# Altium PCB PCB1.PcbDoc
Units mil, origin at the board's own origin, x right, y up, seen from the top; angles counter-clockwise.
Board outline 6000 x 4000 mil, 4 copper layers (Top Layer, 5V, GND, Bottom Layer), stack 23.756 mil thick; 43 components, 34 nets, 161 pads, 102 vias.
Unrouted connection lines stored in the file: 13.
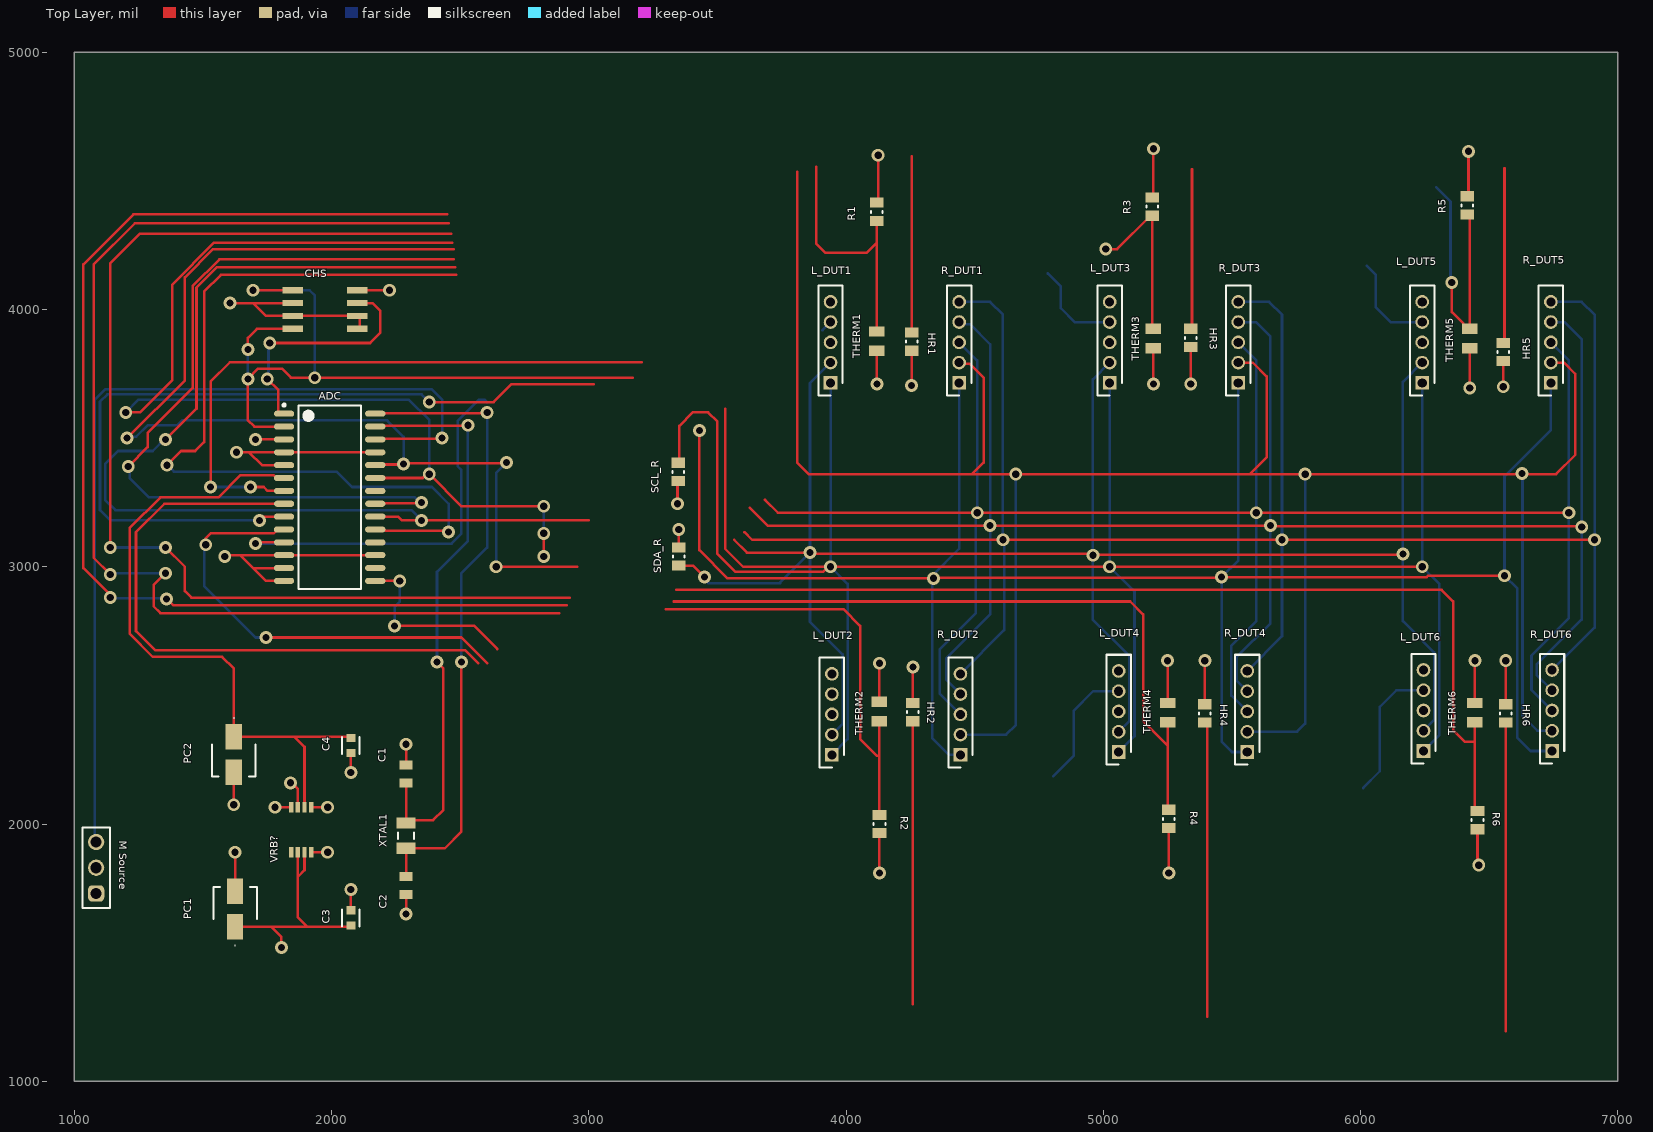
[diagram p0: Top Layer view]
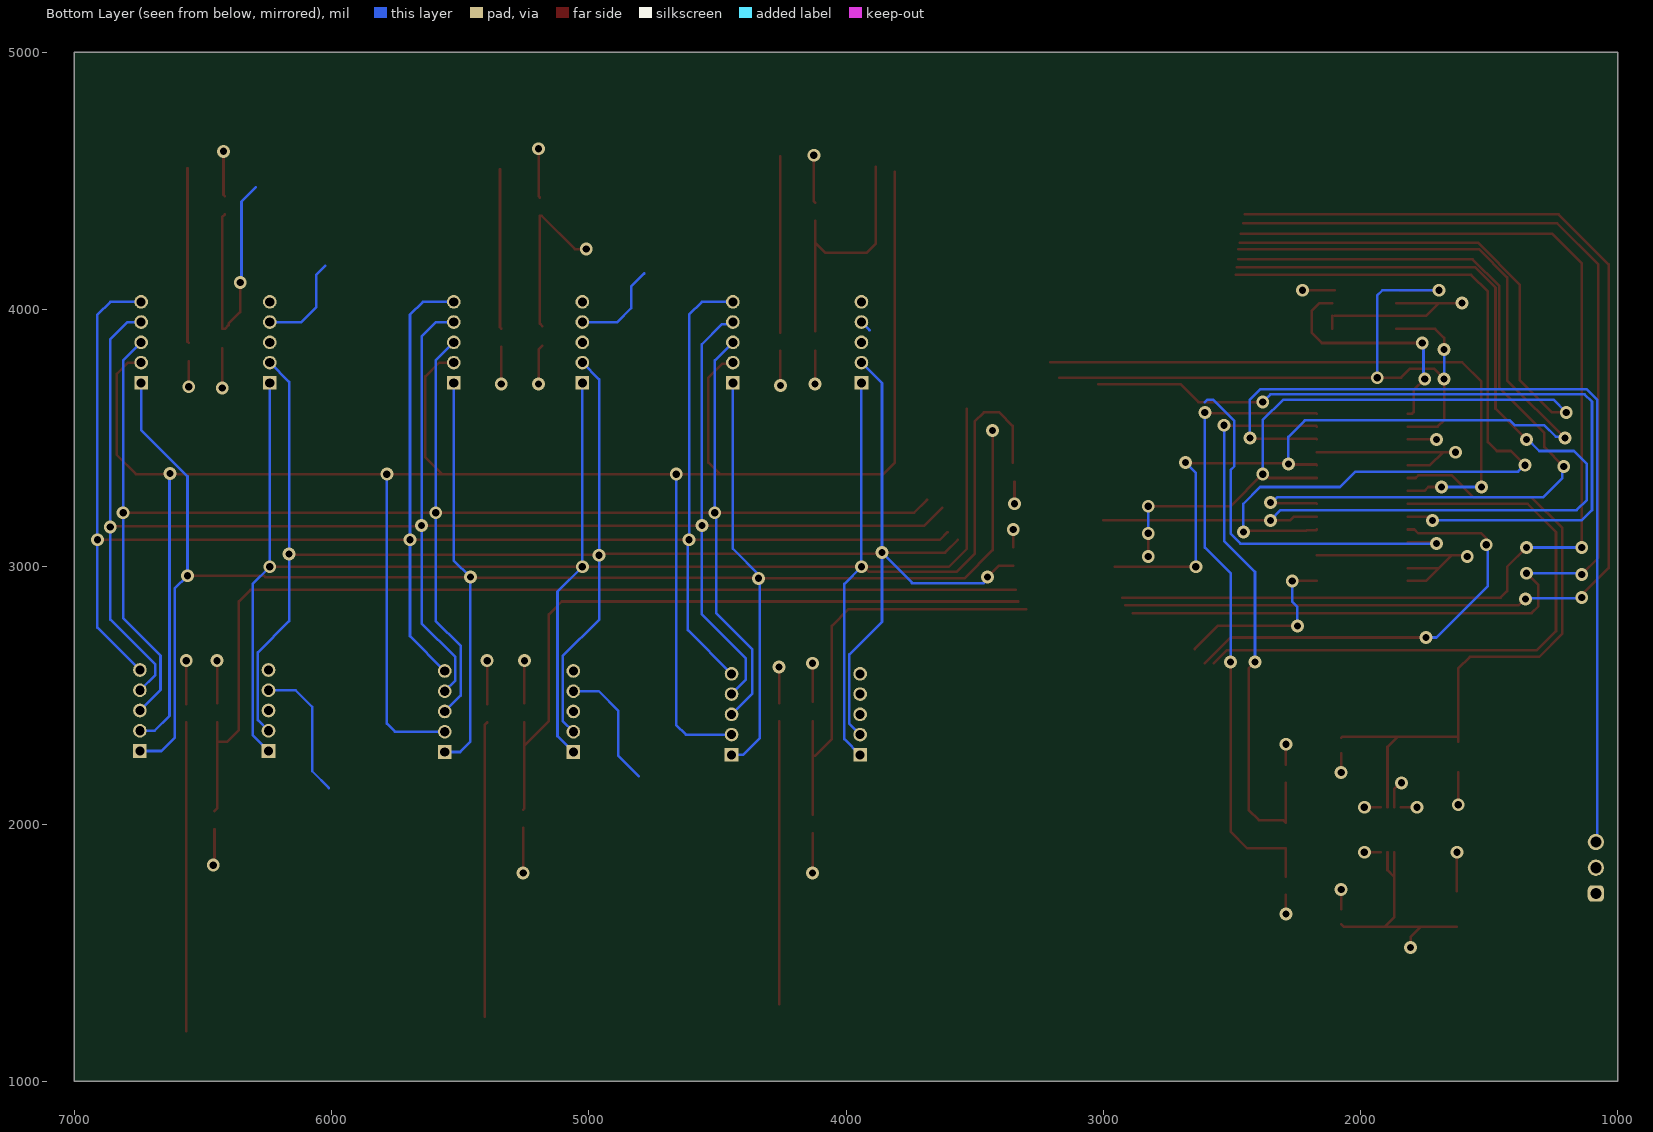
[diagram p1: Bottom Layer view, seen from below]
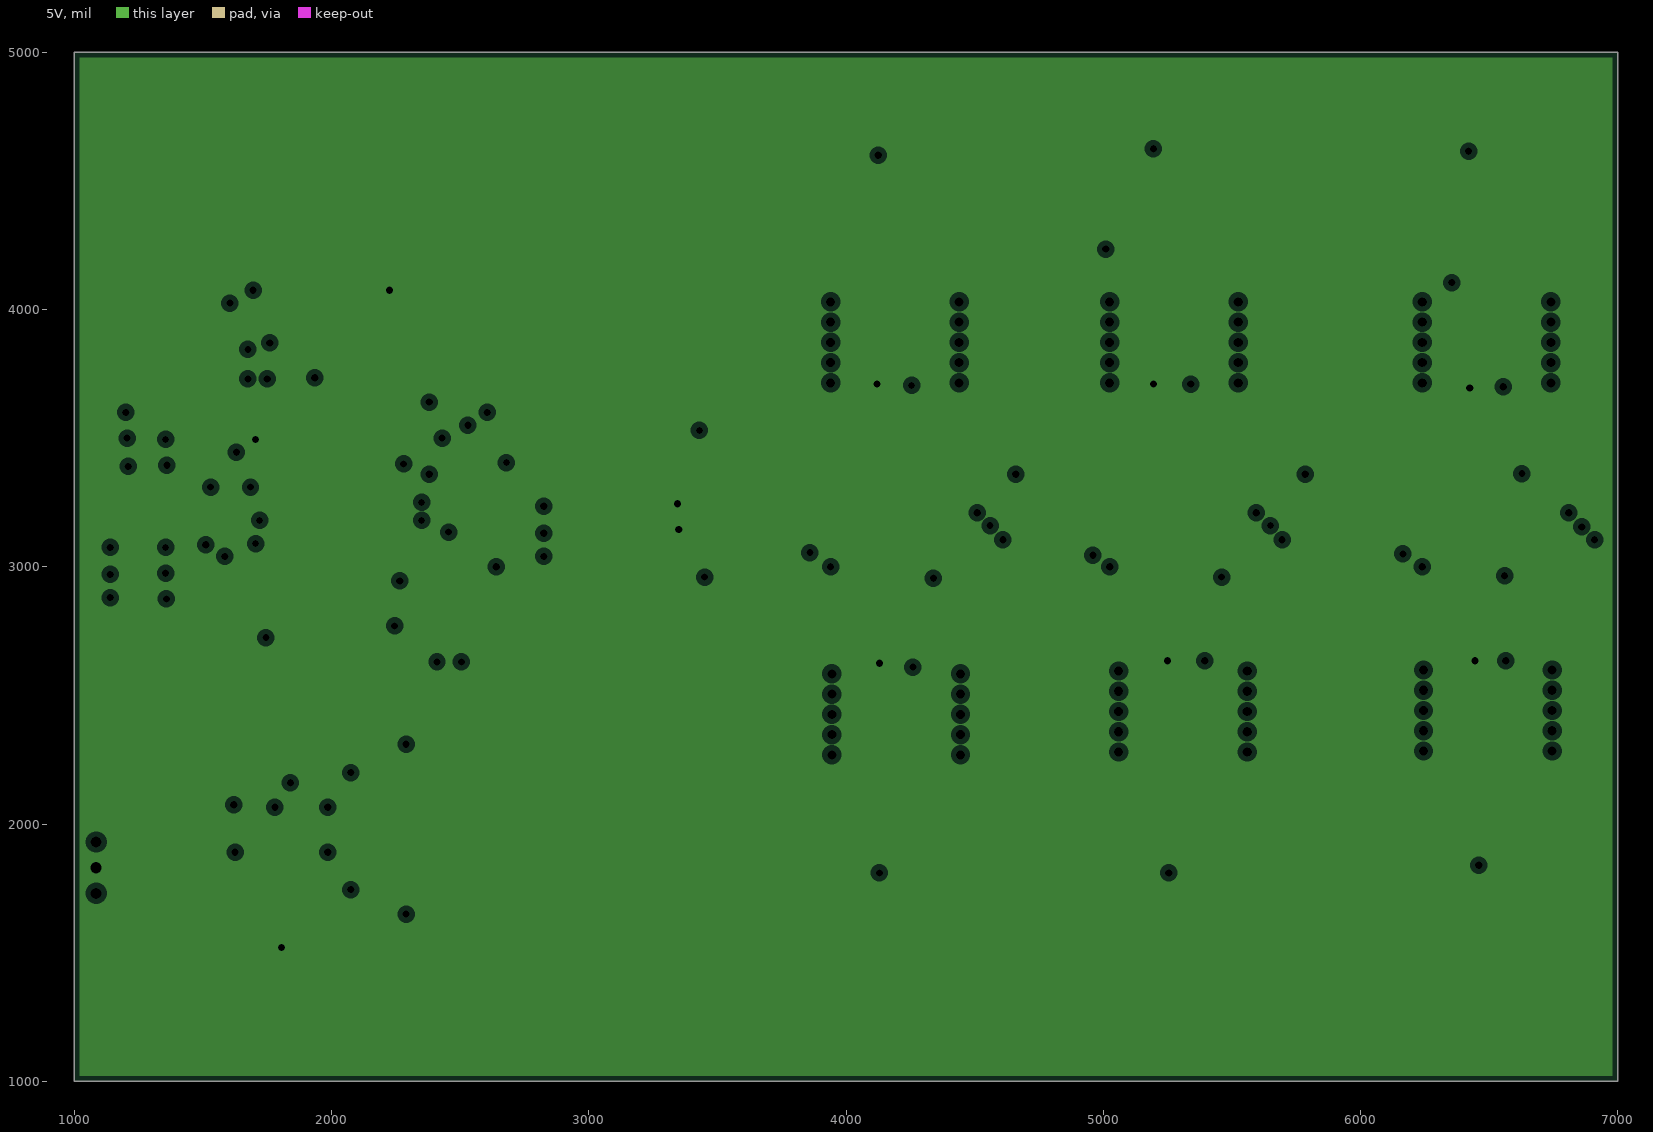
[diagram p2: 5V, clearances drawn from the general rule]
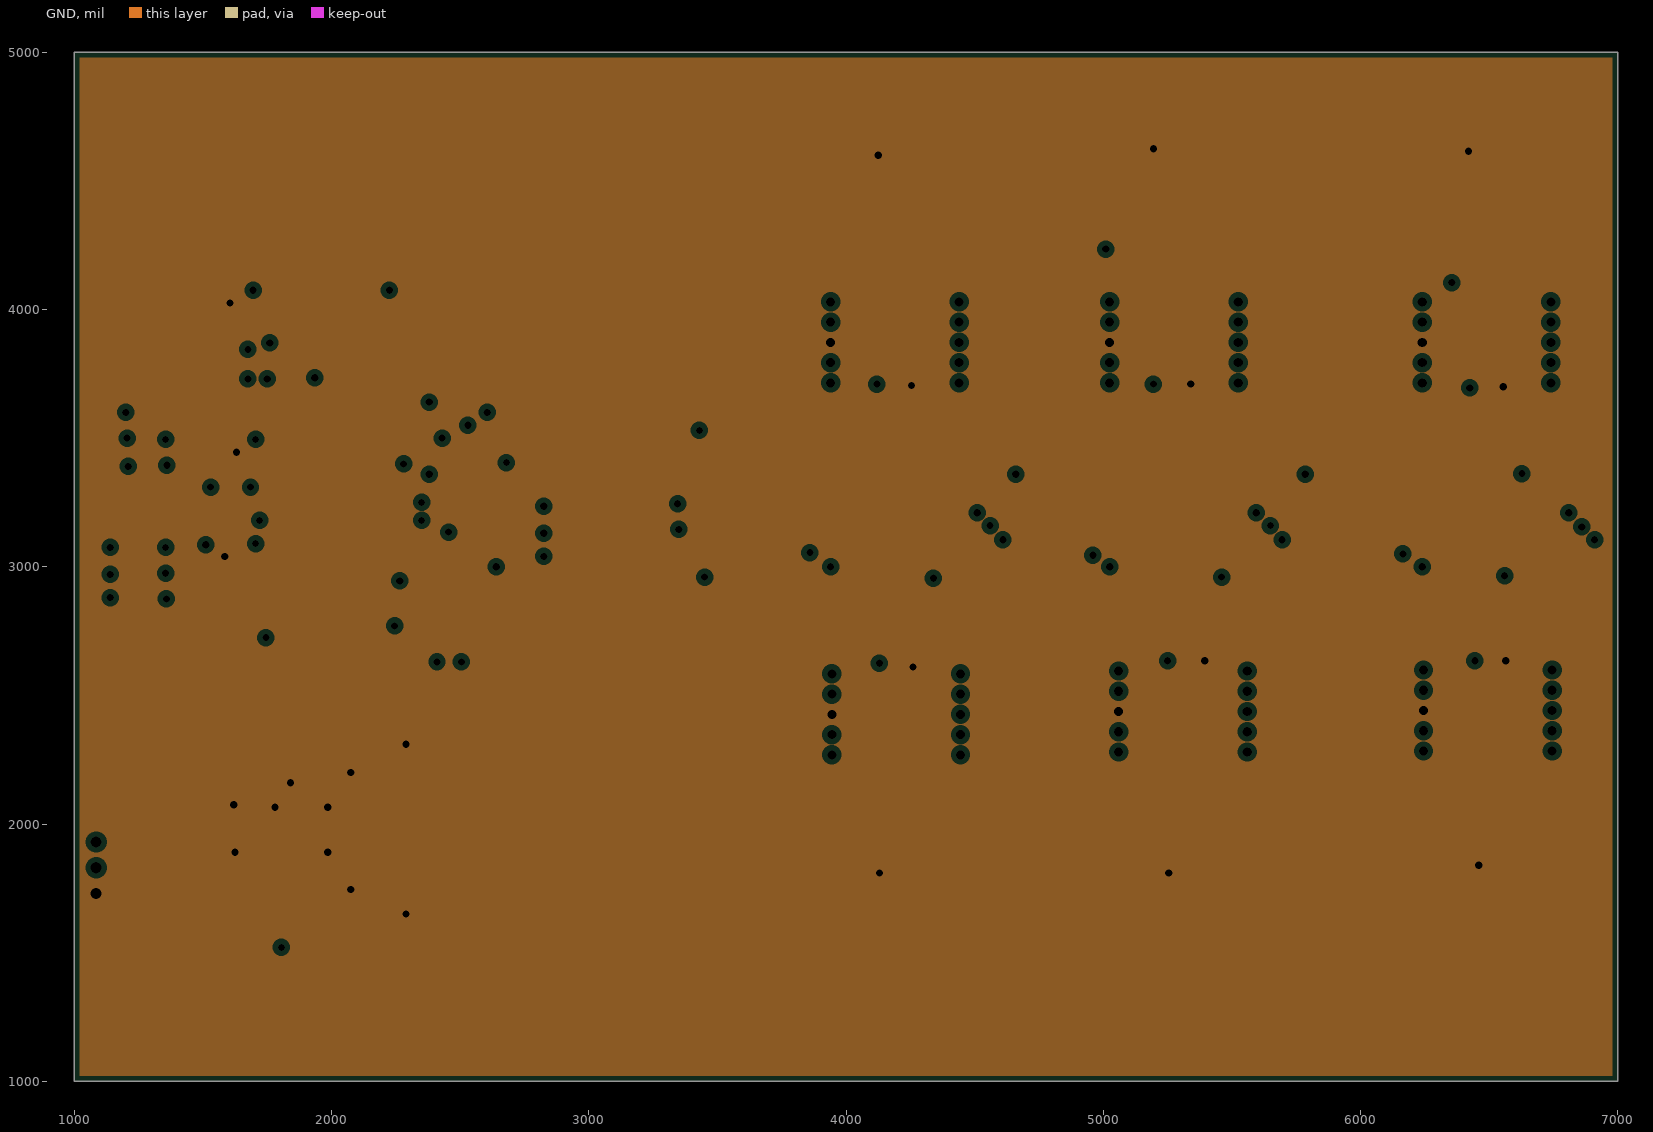
[diagram p3: GND, clearances drawn from the general rule]
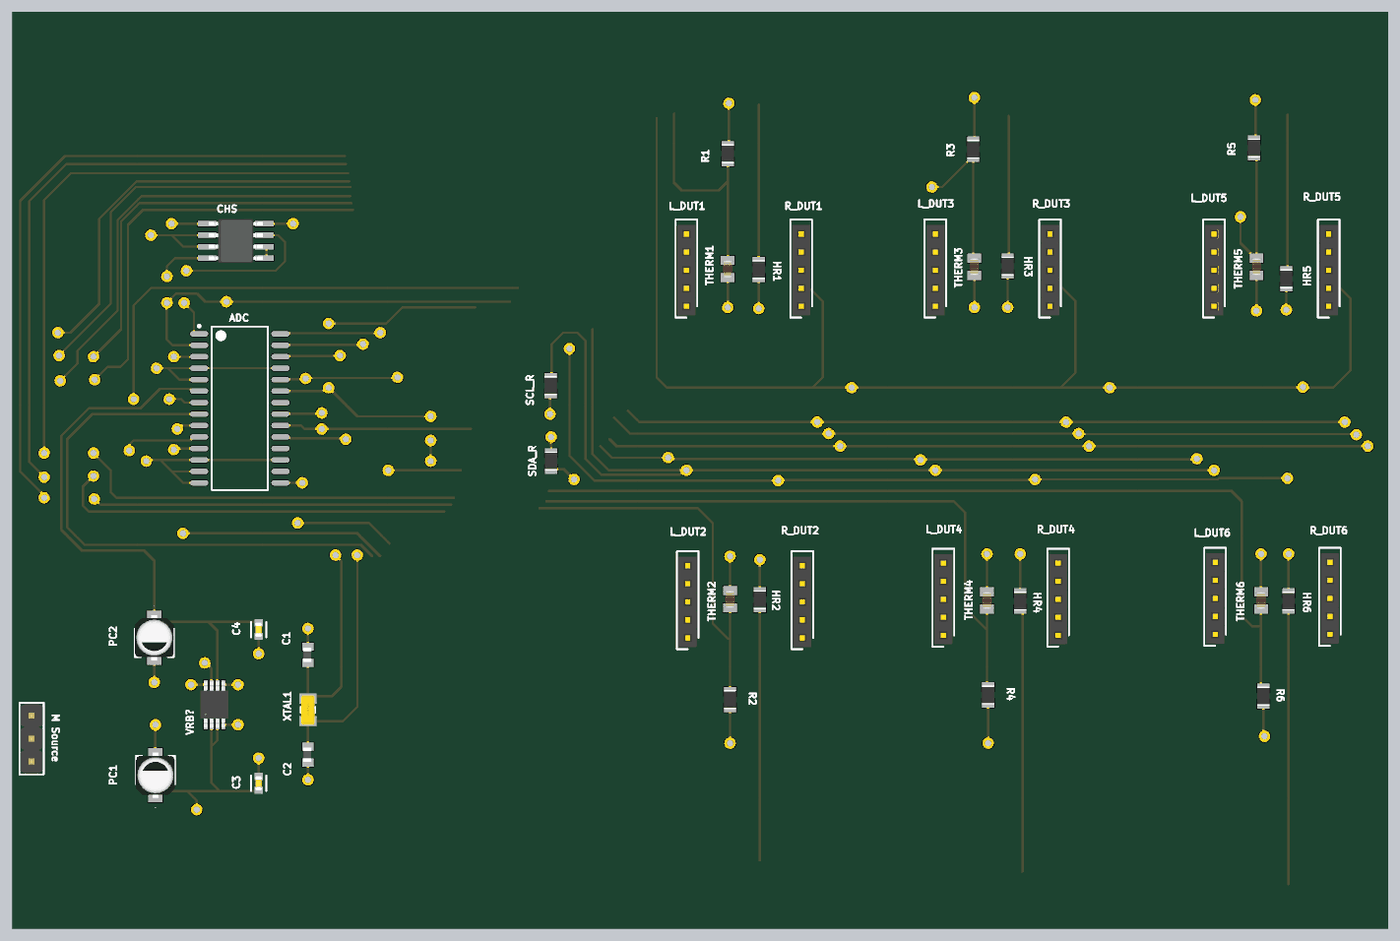
[diagram p4: 3D render of the assembled board from above, using the file's embedded part models]

## Layer stack, top to bottom
Top Solder: solder mask 0.4, Solder Resist, Dk 3.5
Top Layer: signal copper 1.4
Dielectric 2: prepreg 2.8, PP-006, Dk 4.1
5V: plane copper 1.378, net A5V0
Dielectric 1: dielectric 12.6, FR-4, Dk 4.8
GND: plane copper 1.378, net AGND
Dielectric 3: prepreg 2.8, PP-006, Dk 4.1
Bottom Layer: signal copper 1.4
Bottom Solder: solder mask 0.4, Solder Resist, Dk 3.5

## Board outline
1000,1000 7000,1000 7000,5000 1000,5000

## Design rules (kind name [scope] priority, off if disabled: settings)
Clearance [All] p1: gap=5 ignorepadtopadclearanceinfootprint=FALSE
PlaneClearance [All] p1: clearance=20
PlaneConnect [All] p1: planeconnectstyle=Relief reliefexpansion=20 reliefentries=4 reliefconductorwidth=10 reliefairgap=10
PolygonConnect [All] p1: connectstyle=Relief reliefconductorwidth=10 reliefentries=4 polygonreliefangle="90 Angle" airgapwidth=10
RoutingVias [All] p1: holewidth=28 width=50 viastyle="Through Hole" minholewidth=28 minwidth=50 maxholewidth=28 maxwidth=50
SolderMaskExpansion [All] p1: expansion=4 istentingtop=FALSE
Width [All] p1: maxlimit=10 minlimit=10 preferedwidth=10
28 further rules are at their usual default settings.

## Classes and differential pairs
channel class Headers: DUT1 DUT2 DUT3 DUT4 DUT5 DUT6
component class VRB: C3 C4 PC1 VRB?
component class Thermistors: R1 R2 R3 R4 R5 R6 THERM1 THERM2 THERM3 THERM4 THERM5 THERM6
component class PCB-Schematic: SCL_R SDA_R
component class "Heat Element": HR1 HR2 HR3 HR4 HR5 HR6
component class DUT6: L_DUT6 R_DUT6
component class DUT5: L_DUT5 R_DUT5
component class DUT4: L_DUT4 R_DUT4
component class DUT3: L_DUT3 R_DUT3
component class DUT2: L_DUT2 R_DUT2
component class DUT1: L_DUT1 R_DUT1
component class "Current Sense": CHS
component class ADC: ADC C1 C2 XTAL1

## Components (designator, comment, footprint, x,y, rotation, side; value= is the part's Value field where it differs from the comment)
ADC "AD7718BRZ" RW-28_L 1992.83,3270 r0 top
C1 "CC0603GRNPO9BN120" CC0603GRNPO9BN120 2290,2160 r90 top
C2 "CC0603GRNPO9BN120" CC0603GRNPO9BN120 2290,1725 r90 top
C3 "0.1uF 50V" FP-CC0603-DA-MFG 2075,1635 r90 top value="100 nF"
C4 "0.1uF 50V" FP-CC0603-DA-MFG 2075,2305 r90 top value="100 nF"
CHS "TMCS1108A2UQDR" TMCS1108 1850,4075 r0 top
HR1 "RC0805FR-0710KL" RESC2013X60X35NL10T20 4255,3875 r270 top
HR2 "RC0805FR-0710KL" RESC2013X60X35NL10T20 4260,2435 r90 top
HR3 "RC0805FR-0710KL" RESC2013X60X35NL10T20 5340,3890 r270 top
HR4 "RC0805FR-0710KL" RESC2013X60X35NL10T20 5395,2430 r90 top
HR5 "RC0805FR-0710KL" RESC2013X60X35NL10T20 6555,3835 r270 top
HR6 "RC0805FR-0710KL" RESC2013X60X35NL10T20 6565,2430 r90 top
L_DUT1 "M22-7130542" RHDR5W50P0X200_1X5_1050X240X440P 3940,3715 r90 top (schematic designator L)
L_DUT2 "M22-7130542" RHDR5W50P0X200_1X5_1050X240X440P 3945,2268.78 r90 top (schematic designator L)
L_DUT3 "M22-7130542" RHDR5W50P0X200_1X5_1050X240X440P 5025,3715 r90 top (schematic designator L)
L_DUT4 "M22-7130542" RHDR5W50P0X200_1X5_1050X240X440P 5060,2280 r90 top (schematic designator L)
L_DUT5 "M22-7130542" RHDR5W50P0X200_1X5_1050X240X440P 6240,3715 r90 top (schematic designator L)
L_DUT6 "M22-7130542" RHDR5W50P0X200_1X5_1050X240X440P 6245,2283.78 r90 top (schematic designator L)
"M Source" "61300311121" 61300311121 1085,1830 r90 top
PC1 "EEE-FN0J470R" EEE1AA220WR 1625,1670 r90 top
PC2 "EEE-FN0J470R" EEE1AA220WR 1620,2270 r270 top
R1 "RC0805FR-0710KL" RESC2013X60X35NL10T20 4120,4380 r90 top
R2 "RC0805FR-0710KL" RESC2013X60X35NL10T20 4130,2000 r270 top
R3 "RC0805FR-0710KL" RESC2013X60X35NL10T20 5190,4400 r90 top
R4 "RC0805FR-0710KL" RESC2013X60X35NL10T20 5255,2020 r270 top
R5 "RC0805FR-0710KL" RESC2013X60X35NL10T20 6415,4405 r90 top
R6 "RC0805FR-0710KL" RESC2013X60X35NL10T20 6455,2015 r270 top
R_DUT1 "M22-7130542" RHDR5W50P0X200_1X5_1050X240X440P 4440,3715 r90 top (schematic designator R)
R_DUT2 "M22-7130542" RHDR5W50P0X200_1X5_1050X240X440P 4445,2268.78 r90 top (schematic designator R)
R_DUT3 "M22-7130542" RHDR5W50P0X200_1X5_1050X240X440P 5525,3715 r90 top (schematic designator R)
R_DUT4 "M22-7130542" RHDR5W50P0X200_1X5_1050X240X440P 5560,2280 r90 top (schematic designator R)
R_DUT5 "M22-7130542" RHDR5W50P0X200_1X5_1050X240X440P 6740,3715 r90 top (schematic designator R)
R_DUT6 "M22-7130542" RHDR5W50P0X200_1X5_1050X240X440P 6745,2283.78 r90 top (schematic designator R)
SCL_R "RC0805FR-0710KL" RESC2013X60X35NL10T20 3348.44,3368.88 r270 top
SDA_R "RC0805FR-0710KL" RESC2013X60X35NL10T20 3350,3040 r90 top
THERM1 "MM103J1F" MM103J1F 4120,3840 r90 top
THERM2 "MM103J1F" MM103J1F 4130,2475 r270 top
THERM3 "MM103J1F" MM103J1F 5195,3850 r90 top
THERM4 "MM103J1F" MM103J1F 5250,2470 r270 top
THERM5 "MM103J1F" MM103J1F 6425,3850 r90 top
THERM6 "MM103J1F" MM103J1F 6445,2470 r270 top
VRB? "LTC6652AHMS8-2.5#PBF" LTC6652AHMS8-2.5#PBF 1844.4,1890 r90 top
XTAL1 "ABS07-32.768KHZ-T" FP-ABS07-MFG 2290,1955 r90 top

## Footprints (in the part's own frame and the unit in brackets; to place one, negate y for a bottom-side part, rotate by r counter-clockwise, add the part's x,y. Pads: shape width x height; smd on the part's side, far side on the other; paste and mask are expansions set on the pad)
61300311121 [mm] "Pin Header, pitch 2.54 mm, THT, Vertical, single row, 3p"
  rrect50% 1.6x1.6 hole 1.1: 1(-2.54,0)
  round 1.6 hole 1.1: 2(0,0) 3(2.54,0)
  silkscreen extent -3.96,-1.35 3.96,1.35, body extent -3.81,-1.27 3.81,1.27, height 8.57
CC0603GRNPO9BN120 [mil]
  rect 35x50 smd: 1(0,0) 2(70,0)
  body extent 4,-15 66,20, height 31
EEE1AA220WR [mm]
  rect 2.5x1.6 smd: 1(-1.75,0) 2(1.75,0)
  silkscreen extent -3.63,-2.15 2.15,2.15, body extent -2.5,-2.15 2.5,2.15, height 5.78
FP-ABS07-MFG [mm]
  rect 1.1x1.9 smd paste+0 mask+0: 1(-1.25,0) 2(1.25,0)
  silkscreen extent -0.33,-0.8 0.33,0.8, body extent -1.9,-1.05 1.9,1.05, height 0.25
FP-CC0603-DA-MFG [mm]
  rect 0.8x0.9 smd paste+0 mask+0: 1(-0.75,0) 2(0.75,0)
  silkscreen extent -0.85,-0.85 0.85,0.85, body extent -1.35,-0.75 1.35,0.75, height 0.25
LTC6652AHMS8-2.5#PBF [mil]
  rect 40x17 smd: 1(0,0.6) 2(0,-25) 3(0,-50.6) 4(0,-76.2) 5(175,-76.2) 6(175,-50.6) 7(175,-25) 8(175,0.6)
  body extent -13,-99 189,23, height 43
MM103J1F [mil]
  rect 40x60 smd: 1(0,0) 2(75,0)
  body extent 0,-24 75,25, height 50
RESC2013X60X35NL10T20 [mm] "Chip Resistor, 2-Leads, Body 2.1x1.35mm, IPC Medium Density"
  rect 1x1.35 smd: 1(-0.9,0) 2(0.9,0)
  silkscreen extent -0.1,-0.58 0.1,0.58, body extent -1.05,-0.68 1.05,0.67, height 0.6
RHDR5W50P0X200_1X5_1050X240X440P [mm]
  rect 1.35x1.35 / inner round 1.35 / far side rect 1.35x1.35 hole 0.9: 1(0,0)
  round 1.35 hole 0.9: 2(2,0) 3(4,0) 4(6,0) 5(8,0)
  silkscreen extent -1.25,-1.2 9.6,1.2, body extent -1,-1 9,1, height 4.39
RW-28_L [mm] "SOIC, 28-Leads, Body 17.9x7.5mm, Pitch 1.27mm, IPC High Density"
  oval 2x0.6 smd: 1(-4.5,8.255) 2(-4.5,6.985) 3(-4.5,5.715) 4(-4.5,4.445) 5(-4.5,3.175) 6(-4.5,1.905) 7(-4.5,0.635) 8(-4.5,-0.635) 9(-4.5,-1.905) 10(-4.5,-3.175) 11(-4.5,-4.445) 12(-4.5,-5.715) 13(-4.5,-6.985) 14(-4.5,-8.255) 15(4.5,-8.255) 16(4.5,-6.985) 17(4.5,-5.715) 18(4.5,-4.445) 19(4.5,-3.175) 20(4.5,-1.905) 21(4.5,-0.635) 22(4.5,0.635) 23(4.5,1.905) 24(4.5,3.175) 25(4.5,4.445) 26(4.5,5.715) 27(4.5,6.985) 28(4.5,8.255)
  silkscreen extent -4.62,-9.05 3.1,9.23, body extent -3.8,-9.05 3.8,9.05, height 2.65
TMCS1108 [mil]
  rect 80x24 smd: 1(0,0) 2(0,-50) 3(0,-100) 4(0,-150) 5(250,-150) 6(250,-100) 7(250,-50) 8(250,0)
  body extent 6,-172 244,22, height 64

## Part data
ADC: library part CMP-0313-01290-2, "10 Channel 24-Bit Low Power Sigma-Delta Analog-to-Digital Converter with Serial, SPI Interface, 1.365KSPS, -40 to +85 degC, RW-28, Pb-Free, Tube", Generic Part Number=AD7718, Manufacturer="Analog Devices", Channels=10, Code_JEDEC=MS-013-AE, ComponentLink1Description="Manufacturer URL", ComponentLink1URL=http://www.analog.com/en/index.html, ComponentLink2Description=Datasheet, ComponentLink2URL=http://www.analog.com/static/imported-files/data_sheets/AD7708_7718.pdf, ComponentLink3Description="Package Specification", ComponentLink3URL=http://www.analog.com/static/imported-files/packages/35833120341221RW_28.pdf, ComponentLink4Description="Product URL", ComponentLink4URL=http://www.analog.com/en/analog-to-digital-converters/ad-converters/ad7718/products/product.html, DatasheetVersion=Rev.0, Interface="Ser, SPI", Mounting Technology="Surface Mount", PackageDescription="28-Lead Standard Small Outline Package [SOIC_W]", PackageReference=RW-28, PackageVersion=060706-A, Packing=Tube, PartNumber=AD7718BRZ, Resolution (Bits)=24, RoHS=Y, Throughput Rate (SPS)=1.365K
C1 C2: "12pF 50V"
C3 C4: library part CMP-03422-000468-1, "CAP CER 0.1UF 50V X7R 0603", Capacitance="100 nF", Manufacturer=YAGEO, Manufacturer Part Number=CC0603KPX7R9BB104, Package=CC0603-DA, Temperature="-55°C to +125°C", Temperature Characteristic=X7R, Temperature Coefficient=15%, Temperature Range High=+125°C, Temperature Range Low=-55°C, Tolerance=0.1, Voltage="50 V", Automotive=No, Category=Cap, ComponentLink2Description=Datasheet, ComponentLink2URL=http://www.yageo.com/documents/recent/UPY-GPHC_X7R_6.3V-to-50V_18.pdf, Device Class L1="Passive Components", Device Class L2=Capacitors, Device Class L3="Ceramic Capacitors", Digikey Description="CAP CER 0.1UF 50V X7R 0603", Footprint Url=http://www.yageo.com/exep/pages/download/literatures/UPY-C_GEN_24.pdf, Height=0.9mm, Lead Free=Yes, Material=Ceramic, Mouser Description="Multilayer Ceramic Capacitors MLCC - SMD/SMT 100nF 50V X7R 10%", Octopart=https://octopart.com/cc0603kpx7r9bb104-yageo-12885113, RoHS=TRUE, Voltage Rating="50 V"
HR1 HR2 HR3 HR4 HR5 HR6 R1 R2 R3 R4 R5 R6: "Chip Resistor, 10 KOhm, +/- 1%, 0.125 W, -55 to 155 degC, 0805 (2012 Metric), RoHS, Tape and Reel", Manufacturer=Yageo, Max Operating Temperature="155 degC", Min Operating Temperature="-55 degC", Package Quantity=5000, Voltage Rating="150 V", ComponentLink1Description="Manufacturer URL", ComponentLink1URL=http://www.yageo.com/, ComponentLink2Description=Datasheet, ComponentLink2URL=http://www.yageo.com/documents/recent/PYu-RC_Group_51_RoHS_L_04.pdf, DatasheetVersion="Rev. 4, 02/2016", Height="0.5 mm", Length="2 mm", Mount="Surface Mount", Mounting Technology="Surface Mount", PackageDescription="2-Pin Surface Mounted Device, Body 2 x 1.25 mm", PackageReference=0805, Packaging="Tape and Reel", Pins=2, REACH SVHC="No SVHC", RoHSCompliant=true
"M Source": library part CMP-1502-01062-2, Color=Black, Contact Resistance=20mΩ, Current Rating=3A, Max Operating Temperature=105°C, Min Operating Temperature=-40°C, Operating Supply Voltage=250V, Connector Type="Male Pin", Contact Material=Copper, Contact Mating Length=5.9944mm, Contact Plating=Gold, Gender=Male, Height=8.94mm, Lead Free="Lead Free", Lead Pitch=2.54mm, Mount="Through Hole", NexarPartId=32855521, Number of Contacts=3, Number of Pins=3, Number of Positions=3, Number of Rows=1, Orientation=Vertical, Packaging=Bulk, Pitch=2.54mm, REACH SVHC=Unknown, RoHS=Compliant, Termination=Solder, Voltage Rating=250V
PC1 PC2: "Capacitor Polarised", Manufacturer_Name=Panasonic, Mouser Part Number=667-EEE-FN0J470R, Arrow Part Number=EEE-FN0J470R, Arrow Price/Stock=https://www.arrow.com/en/products/eee-fn0j470r/panasonic, Datasheet Link=http://industrial.panasonic.com/cdbs/www-data/pdf/RDE0000/RDE0000C1259.pdf, Height=5.5mm, Manufacturer_Part_Number=EEE-FN0J470R, Mouser Price/Stock=https://www.mouser.co.uk/ProductDetail/Panasonic/EEE-FN0J470R?qs=OlC7AqGiEDnsjVsw6O9Inw%3D%3D
SCL_R SDA_R: library part "RESIST 0805", "Chip Resistor, 10 KOhm, +/- 1%, 0.125 W, -55 to 155 degC, 0805 (2012 Metric), RoHS, Tape and Reel", Manufacturer=Yageo, Max Operating Temperature="155 degC", Min Operating Temperature="-55 degC", Package Quantity=5000, Voltage Rating="150 V", ComponentLink1Description="Manufacturer URL", ComponentLink1URL=http://www.yageo.com/, ComponentLink2Description=Datasheet, ComponentLink2URL=http://www.yageo.com/documents/recent/PYu-RC_Group_51_RoHS_L_04.pdf, DatasheetVersion="Rev. 4, 02/2016", Height="0.5 mm", Length="2 mm", Mount="Surface Mount", Mounting Technology="Surface Mount", PackageDescription="2-Pin Surface Mounted Device, Body 2 x 1.25 mm", PackageReference=0805, Packaging="Tape and Reel", Pins=2, REACH SVHC="No SVHC", RoHSCompliant=true
XTAL1: library part CMP-0447-00001-4, "Crystal 32.768kHz ±20ppm (Tol) 12.5pF FUND 70kΩ 2-Pin CSMD T/R", Case/Package=CSMD, ESR (Equivalent Series Resistance)=70kR, Frequency=32.768kHz, Frequency Tolerance=20ppm, Load Capacitance=12.5pF, Max Operating Temperature=85°C, Min Operating Temperature=-40°C, Operating Frequency="32.768 kHz", Package Quantity=3000, Depth=1.5mm, Height=0.9mm, Lead Free="Lead Free", Length=3.2mm, Number of Pins=2, Packaging="Tape and Reel", Radiation Hardening=No, REACH SVHC="No SVHC", RoHS Compliant=Yes, Series=ABS07, Series Resistance=70kR, Termination=SMD/SMT, Tolerance=20ppm, Width=1.5mm

## Via types
v1: diameter 50, hole 28, Top Layer to Bottom Layer, 102 vias

## Nets (pads, with @x,y where several pads share a name; then routed paths per layer and width w, separated by ;. In a path a pad name is that pad's centre, name@x,y a point inside that pad or via, vN(x,y) a via of type N, cw(c..) or ccw(c..) an arc to the next point about the centre after c; other vN are vias at no path point)
3V3: "M Source.3" ADC.26 | length 3505.2
  Top Layer w10: ADC.26 2172.5,3497.5 2427.5,3497.5 v1(2430,3500)
  Bottom Layer w10: 1080,1940 1080,3650 1120,3690 2390,3690 2430,3650 v1(2430,3500)
A5V0: "M Source.2" ADC.3 C3.1 CHS.8 PC1.1 SCL_R.2 SDA_R.2 THERM1.1 THERM2.1 THERM3.1 THERM4.1 THERM5.1 THERM6.1 VRB?.2 VRB?.3 | length 2292.7
  Top Layer w10: PC1.1 1763.9,1601.1 ; v1(1705,3495) ADC.3 ; v1(1805,1520) 1805,1560 1763.9,1601.1 ; VRB?.2 1869.4,1795 ; VRB?.3 1895,1820.6 1869.4,1795 ; C3.1@2075,1610.47 2065.63,1601.1 1905,1601.1 ; CHS.8 v1(2225,4075) ; v1(3345,3245) SCL_R.2@3345,3330 ; SDA_R.2 v1(3350,3145) ; v1(4120,3710) THERM1.1 ; THERM2.1 v1(4130,2625) v1@4130,2635 ; THERM3.1@5180,3860 5195,3845 v1(5195,3710) ; THERM4.1 v1(5250,2635) ; v1@6425,3685 v1(6425,3695) THERM5.1 ; THERM6.1 v1(6445,2635) ; 1763.9,1601.1 1905,1601.1 ; 1869.4,1795 1869.4,1636.7 1905,1601.1
AGND: "M Source.1" ADC.4 ADC.5 ADC.12 ADC.13 ADC.14 ADC.17 ADC.25 C1.2 C2.1 C3.2 C4.1 CHS.2 CHS.3 CHS.5 CHS.6 HR1.2 HR2.2 HR3.2 HR4.2 HR5.2 HR6.2 L_DUT1.3 L_DUT2.3 L_DUT3.3 L_DUT4.3 L_DUT5.3 L_DUT6.3 PC1.2 PC2.2 R1.2 R2.2 R3.2 R4.2 R5.2 R6.2 VRB?.4 VRB?.5 VRB?.7 VRB?.8 | length 5160.9
  Top Layer w10: v1@1575,3045 1645,3045 ; v1(1605,4025) 1695,4025 ; v1(1620,2075) PC2.2 ; PC1.2 v1(1625,1890) ; v1(1630,3445) 1680,3445 ; v1(1780,2065) VRB?.8 ; ADC.14 1745,2945 1695,2995 ; ADC.13 1695,2995 ; ADC.5 1730,3395 1680,3445 ; v1@1835,2170 1869.4,2135.6 VRB?.7 ; CHS.2@1860,4025 1695,4025 ; VRB?.4 v1(1985,1890) ; VRB?.5 v1(1985,2065) ; C3.2@2075,1669.53 v1(2075,1745) ; v1(2075,2200) C4.1 ; CHS.6 CHS.3 1745,3975 1695,4025 ; CHS.5@2110,3925 CHS.6@2110,3975 ; ADC.17 ADC.12 1645,3045 ; ADC.25 ADC.4 1680,3445 ; v1(2290,1650) C2.1 ; C1.2 v1(2290,2310) ; R1.2 4125,4420.43 v1(4125,4600) ; v1(4130,1810) R2.2 ; v1(4255,3705) HR1.2 ; HR2.2 v1(4260,2610) ; R3.2 5195,4440.43 v1(5195,4625) ; v1(5255,1810) R4.2 ; v1@5340,3700 HR3.2 ; HR4.2 v1(5395,2635) ; R5.2 6420,4445.43 v1(6420,4615) ; v1@6455,1830 R6.2 ; v1@6555,3690 HR5.2 ; HR6.2 v1(6565,2635) ; 1645,3045 1695,2995
  other v1: 6460,1840 1840,2160 1585,3040 6555,3700 5340,3710
"NetADC 1_1": ADC.21 | length 3280.4
  Top Layer w10: v1(1210,3390) 1285,3465 1285,3520 1460,3695 1460,4091.21 1563.79,4195 2475,4195 ; ADC.21 2172.5,3247.5 2347.5,3247.5 v1(2350,3250)
  Bottom Layer w10: v1@1200,3400 v1(1210,3390) 1214.99,3385.01 1214.99,3345.01 1290,3270 2324.14,3270 2344.14,3250 v1(2350,3250)
"NetADC 1_2": ADC.24 R_DUT1.4 R_DUT2.4 R_DUT3.4 R_DUT4.4 R_DUT5.4 R_DUT6.4 | length 12383.9
  Top Layer w10: v1(1205,3500) 1430,3725 1430,4125 1540,4235 2475,4235 ; ADC.24 2172.5,3397.5 2277.5,3397.5 v1(2280,3400) 2282.5,3402.5 2677.5,3402.5 v1(2680,3405) ; v1(2640,3000) 2955,3000 ; 3625,3230 3695,3160 v1(4560,3160) v1(5650,3160) 5652.5,3157.5 6857.5,3157.5 v1(6860,3155)
  Bottom Layer w10: v1@1200,3500 1205.38,3505.38 1240.38,3505.38 1285,3550 1400,3550 1420,3570 2215,3570 2217.93,3567.07 2280,3505 v1(2280,3400) ; v1(2640,3000) 2640,3365 v1(2680,3405) ; R_DUT1.4 4447.8,3943.43 4481.57,3943.43 4560,3865 v1(4560,3160) 4560,2815 4390,2645 4390,2560 R_DUT2.4 ; R_DUT3.4 5593.78,3951.22 5650,3895 v1(5650,3160) 5650,2780 5518.43,2648.43 5518.43,2557.8 R_DUT4.4 ; R_DUT5.4 6793.78,3951.22 6860,3885 v1(6860,3155) 6860,2795 6685,2620 6685,2580 R_DUT6.4
"NetADC 1_3": ADC.23 R_DUT1.1 R_DUT2.1 R_DUT3.1 R_DUT4.1 R_DUT5.1 R_DUT6.1 | length 12508.3
  Top Layer w10: v1(1200,3600) 1255,3600 1380,3725 1380,4096.21 1543.79,4260 2470,4260 ; ADC.23 2354.18,3345 2369.18,3360 v1(2380,3360) 2505,3235 v1(2825,3235) ; v1(2825,3040) v1(2825,3130) ; v1(3430,3530) 3430,3065 3540,2955 v1(4340,2955) 4342.5,2957.5 5457.5,2957.5 v1(5460,2960) 6256.57,2960 6261.57,2965 v1(6560,2965)
  Bottom Layer w10: v1(1200,3600) 1250,3650 2300,3650 2380,3570 v1(2380,3360) ; v1(2825,3040) v1@2825,3050 ; v1(2825,3130) v1(2825,3235) v1@2825,3245 ; R_DUT1.1 4440,3070 4335,2965 4335,2335 4401.22,2268.78 R_DUT2.1 ; R_DUT3.1 5525,3025 v1(5460,2960) 5460,2320 5500,2280 R_DUT4.1 ; R_DUT5.1 6740,3531.57 6560,3351.57 v1(6560,2965) 6610,2915 6610,2335 6661.22,2283.78 R_DUT6.1
"NetADC 2_1": ADC.19 | length 3337.5
  Top Layer w10: v1(1360,3395) 1415,3450 1470,3450 1505,3485 1505,4070 1570,4135 2485,4135 ; ADC.19 2172.61,3142.39 2207.83,3142.39 2210.23,3140 2450,3140 v1(2455,3135)
  Bottom Layer w10: v1@1355,3400 1357.35,3400 1387.35,3370 2020,3370 2080,3310 2390,3310 2455,3245 v1(2455,3135)
"NetADC 2_2": ADC.20 R_DUT1.3 R_DUT2.3 R_DUT3.3 R_DUT4.3 R_DUT5.3 R_DUT6.3 | length 11990.7
  Top Layer w10: v1(1355,3495) 1475,3615 1475,4085 1555,4165 2480,4165 ; ADC.20 2258.88,3195 2273.88,3180 v1(2350,3180) 3000,3180 ; 3685,3260 3735,3210 v1(4510,3210) v1(5595,3210) v1(6810,3210)
  Bottom Layer w10: v1@1355,3500 1305,3450 1170,3450 1120,3400 1120,3260 1160,3220 2310,3220 v1(2350,3180) ; R_DUT1.3 4510,3802.48 v1(4510,3210) 4505,3205 4505,2820 4365,2680 4365,2506.26 R_DUT2.3 ; R_DUT3.3 5595,3802.48 v1(5595,3210) 5595,2790 5498.43,2693.43 5498.43,2499.06 R_DUT4.3 ; R_DUT5.3 6810,3802.48 v1(6810,3210) 6810,2800 6665,2655 6665,2521.26 R_DUT6.3
NetADC_1: ADC.1 CHS.7 | length 946.9
  Top Layer w10: v1(1750,3730) 1793.11,3686.89 1793.11,3601.29 1799.4,3595 ADC.1 ; v1(1760,3870) 2150,3870 2190,3910 2190,3995 2160,4025 CHS.7@2110,4025
  Bottom Layer w10: v1@1745,3725 v1(1750,3730) 1755,3735 1755,3865 v1(1760,3870)
NetADC_2: ADC.2 CHS.1 CHS.4 R_DUT1.2 R_DUT2.2 R_DUT3.2 R_DUT4.2 R_DUT5.2 R_DUT6.2 | length 12109.1
  Top Layer w10: v1(1675,3730) 1715,3770 1807.09,3770 1842.09,3735 v1(1935,3735) 3170,3735 ; v1(1675,3845) 1675,3890 1710,3925 CHS.4 CHS.4@1860,3925 ; v1@1685,3730 1674.14,3719.14 1674.14,3570.86 1700,3545 ADC.2 ; v1(1695,4075) CHS.1 ; 3810,4535 3810,3405 3855,3360 4490,3360 ; R_DUT1.2 4445.31,3788.43 4481.57,3788.43 4535,3735 4535,3405 4490,3360 ; R_DUT3.2 5581.26,3793.74 5635,3740 5635,3425 5570,3360 ; R_DUT5.2 6791.26,3793.74 6835,3750 6835,3435 6760,3360 v1(5785,3360) 5570,3360 ; 4490,3360 v1(4660,3360) 5570,3360
  Bottom Layer w10: v1(1675,3730) v1(1675,3845) ; v1(1695,4075) 1915,4075 1935,4055 v1(1935,3735) ; R_DUT2.2 4622.52,2347.52 4660,2385 v1(4660,3360) ; R_DUT4.2 5753.74,2358.74 5785,2390 v1(5785,3360) ; v1@6625,3365 v1(6627.5,3362.5) 6630,3360 6630,2420 6687.48,2362.52 R_DUT6.2
NetADC_6: ADC.6 C4.2 PC2.1 VRB?.6 | length 2592.5
  Top Layer w10: PC2.1@1620,2320 1620,2605 1575,2650 1305,2650 1215,2740 1215,3150 1335,3270 1560,3270 1645,3355 1775.44,3355 1785.44,3345 ADC.6 ; PC2.1 1856.1,2338.9 ; VRB?.6 1895,2300 1856.1,2338.9 ; C4.2 2070.63,2338.9 1856.1,2338.9
NetADC_7: ADC.7 R1.1 THERM1.2 | length 3403.6
  Top Layer w10: v1(1530,3310) 1530,3720 1605,3795 3205,3795 ; v1(1685,3310) 1736.45,3310 1751.45,3295 ADC.7 ; 3885,4555 3885,4255 3920,4220 4080,4220 4120,4260 ; THERM1.2 4120,4260 ; R1.1 4120,4260
  Bottom Layer w10: v1(1530,3310) v1(1685,3310)
NetADC_8: ADC.8 R2.1 THERM2.2 | length 4076.4
  Top Layer w10: ADC.8 1350,3245 1240,3135 1240,2750 1315,2675 2520,2675 2570,2625 ; 3300,2835 3990,2835 4055,2770 4055,2330 4120,2265 4130,2265 ; R2.1 4130,2265 ; THERM2.2 4130,2265
NetADC_9: ADC.9 R3.1 THERM3.2 | length 3800.7
  Top Layer w10: v1(1720,3180) 1735,3195 ADC.9 ; v1(2380,3640) 2630.41,3640 2700.41,3710 3020,3710 ; v1(5010,4235) 5053.54,4235 5183.11,4364.57 R3.1 5190,3945 THERM3.2@5180,3935
  Bottom Layer w10: v1(1720,3180) 1140,3180 1100,3220 1100,3641.72 1128.28,3670 2350,3670 v1(2380,3640)
NetADC_10: ADC.10 R4.1 THERM4.2 | length 4468.2
  Top Layer w10: v1(1510.78,3085.78) 1510.78,3110.78 1530,3130 1775.44,3130 1790.44,3145 ADC.10 ; v1(1745,2725) 2505,2725 2605,2625 ; 3330,2865 5105,2865 5155,2815 5155,2400 5250,2305 ; THERM4.2 5250,2305 ; R4.1 5250,2060.43 5250,2305
  Bottom Layer w10: v1(1510.78,3085.78) 1505,3080 1505,2925 1705,2725 v1(1745,2725)
NetADC_11: ADC.11 R5.1 THERM5.2 | length 2580.1
  Top Layer w10: v1@1705,3095 ADC.11 ; v1(6355,4105) 6355,3990 6400,3945 6400,3940 6415,3925 THERM5.2 6425,4359.57 R5.1
  Bottom Layer w10: v1(1705,3090) 2466.57,3090 2505,3128.43 2505,3375.78 2490,3390.78 2490,3566.57 2573.43,3650 2595,3650 2605,3640 ; 6295,4475 6350,4420 6350,4120 v1@6360,4110
NetADC_15: ADC.15 R6.1 THERM6.2 | length 4706.6
  Top Layer w10: ADC.15 v1(2265,2945) ; v1(2245,2770) 2555,2770 2645,2680 ; 3340,2910 6315,2910 6360,2865 6360,2365 6405,2320 6445,2320 ; THERM6.2 6445,2320 ; R6.1 6445,2060.43 6445,2320
  Bottom Layer w10: v1(2245,2770) 2245,2843.67 2265,2863.67 v1(2265,2945)
NetADC_27: ADC.27 C1.1 XTAL1.2 | length 2239
  Top Layer w10: ADC.27 2172.5,3547.5 2527.5,3547.5 v1(2530,3550) ; C1.1 XTAL1.2 2300.79,2015 2395,2015 2435,2055 2435,2605 v1(2410,2630)
  Bottom Layer w10: v1(2410,2630) 2410,2980 2530,3100 v1(2530,3550)
NetADC_28: ADC.28 C2.2 XTAL1.1 | length 2460.9
  Top Layer w10: ADC.28 2172.5,3597.5 2602.5,3597.5 v1(2605,3600) ; C2.2 XTAL1.1 2440.79,1905.79 2505,1970 v1(2505,2630)
  Bottom Layer w10: v1(2505,2630) 2505,2975 2605,3075 v1(2605,3600)
"NetDUT Pins_1": L_DUT1.2 L_DUT2.2 L_DUT3.2 L_DUT4.2 L_DUT5.2 L_DUT6.2 SDA_R.1 | length 12461.3
  Top Layer w10: v1(1140,2880) 1140,2890 1035,2995 1035,4175 1230,4370 2450,4370 ; v1@1355,2875 v1(1357.91,2875) 1360.82,2875 1385.82,2850 2915,2850 ; SDA_R.1 3405.43,3004.57 v1(3450,2960) ; 3565,3105 3615,3055 v1(3860,3055) 3865,3050 4955,3050 v1(4960,3045) 4962.5,3047.5 6162.5,3047.5 v1(6165,3050)
  Bottom Layer w10: v1(1140,2880) 1142.5,2877.5 1355.41,2877.5 v1(1357.91,2875) ; v1@3445,2955 3464.14,2935.86 3745,2935.86 3745,2940 v1(3860,3055) ; L_DUT1.2 3860,3713.74 v1(3860,3055) ; L_DUT2.2 3986.57,2389.09 3986.57,2659.19 3860,2785.76 v1(3860,3055) ; L_DUT3.2 4960,3728.74 v1(4960,3045) 4960,2793.87 5101.57,2652.3 5101.57,2400.32 L_DUT4.2 ; L_DUT5.2 6165,3718.74 v1(6165,3050) 6165,2788.26 6286.57,2666.69 6286.57,2404.09 L_DUT6.2
"NetDUT Pins_2": L_DUT1.1 L_DUT2.1 L_DUT3.1 L_DUT4.1 L_DUT5.1 L_DUT6.1 SCL_R.1 | length 13715.1
  Top Layer w10: v1(1140,2970) 1075,3035 1075,4175 1235,4335 2455,4335 ; v1(1355,2975) 1308.5,2928.5 1308.5,2846.52 1335.02,2820 2885,2820 ; SCL_R.1@3351.89,3404.31 3351.89,3548.07 3403.82,3600 3463.82,3600 3500,3563.82 3500,3050 3570,2980 3910,2980 v1@3930,3000 ; 3530,3615 3530,3070 3600,3000 v1@3930,3000 ; v1(6240,3000) v1(5025,3000) v1(3940,3000) v1@3930,3000
  Bottom Layer w10: v1@1135,2965 v1(1140,2970) 1145,2975 v1(1355,2975) ; L_DUT1.1 v1(3940,3000) 4006.57,2933.43 4006.57,2330.35 L_DUT2.1 ; L_DUT3.1 v1(5025,3000) 5121.57,2903.43 5121.57,2341.57 L_DUT4.1 ; L_DUT5.1 v1(6240,3000) 6306.57,2933.43 6306.57,2345.35 L_DUT6.1
"NetDUT Pins_3": R_DUT1.5 R_DUT2.5 R_DUT3.5 R_DUT4.5 R_DUT5.5 R_DUT6.5 | length 12647.9
  Top Layer w10: v1(1140,3075) 1140,4180 1255,4295 2465,4295 ; v1(1355,3075) 1430,3000 1430,2905 1455,2880 2925,2880 ; 3605,3135 3635,3105 v1(4610,3105) v1(5695,3105) v1(6910,3105)
  Bottom Layer w10: v1(1140,3075) v1(1355,3075) ; R_DUT1.5 4560.04,4029.96 4610,3980 v1(4610,3105) 4615,3100 4615,2753.74 R_DUT2.5 ; R_DUT3.5 5645.04,4029.96 5695,3980 v1(5695,3105) 5695,2729.96 R_DUT4.5 ; R_DUT5.5 6860.04,4029.96 6910,3980 v1(6910,3105) 6910,2763.74 R_DUT6.5
"NetHeat 1_1": HR5.1 | length 681.6
  Top Layer w10: HR5.1 6560,3875.43 6560,4550
"NetHeat 1_2": HR3.1 | length 621.6
  Top Layer w10: HR3.1 5345,3930.43 5345,4545
"NetHeat 1_3": HR1.1 | length 684.6
  Top Layer w10: HR1.1 4255,4595
"NetHeat 2_1": HR2.1 | length 1099.6
  Top Layer w10: 4260,1300 HR2.1
"NetHeat 2_2": HR4.1 | length 1148.7
  Top Layer w10: HR4.1 5405,2384.57 5405,1250
"NetHeat 2_3": HR6.1 | length 1199.6
  Top Layer w10: 6565,1195 HR6.1
VCC_DUT1: L_DUT1.4 | length 44.2
  Bottom Layer w10: 3908.78,3920 L_DUT1.4
VCC_DUT2: L_DUT2.4
VCC_DUT3: L_DUT3.4 | length 368
  Bottom Layer w10: 4785,4140 4835,4090 4835,4005 4888.78,3951.22 L_DUT3.4
VCC_DUT4: L_DUT4.4 | length 494.7
  Bottom Layer w10: 4805,2185 4885,2265 4885,2440 4961.22,2516.22 L_DUT4.4
VCC_DUT5: L_DUT5.4 | length 380.6
  Bottom Layer w10: 6025,4170 6060,4135 6060,4010 6059.14,4009.14 6117.06,3951.22 L_DUT5.4
VCC_DUT6: L_DUT6.4 | length 538.8
  Bottom Layer w10: 6010,2140 6075,2205 6075,2455 6140,2520 L_DUT6.4
pads on no net: ADC.16 ADC.18 ADC.22 L_DUT1.5 L_DUT2.5 L_DUT3.5 L_DUT4.5 L_DUT5.5 L_DUT6.5 VRB?.1

## Polygon pours and split planes (outlines as drawn)
A5V0 on 5V (split plane): 6979.9,1020.1 1020.1,1020.1 1020.1,4979.9 6979.9,4979.9
AGND on GND (split plane): 6979.9,1020.1 1020.1,1020.1 1020.1,4979.9 6979.9,4979.9